# Altium PCB CH585M-R1-1v1.PcbDoc
Units mil, origin at the board's own origin, x right, y up, seen from the top; angles counter-clockwise.
Board outline 4173.23 x 2325.79 mil, 2 copper layers (Top Layer, Bottom Layer); 49 components, 68 nets, 239 pads, 569 vias.
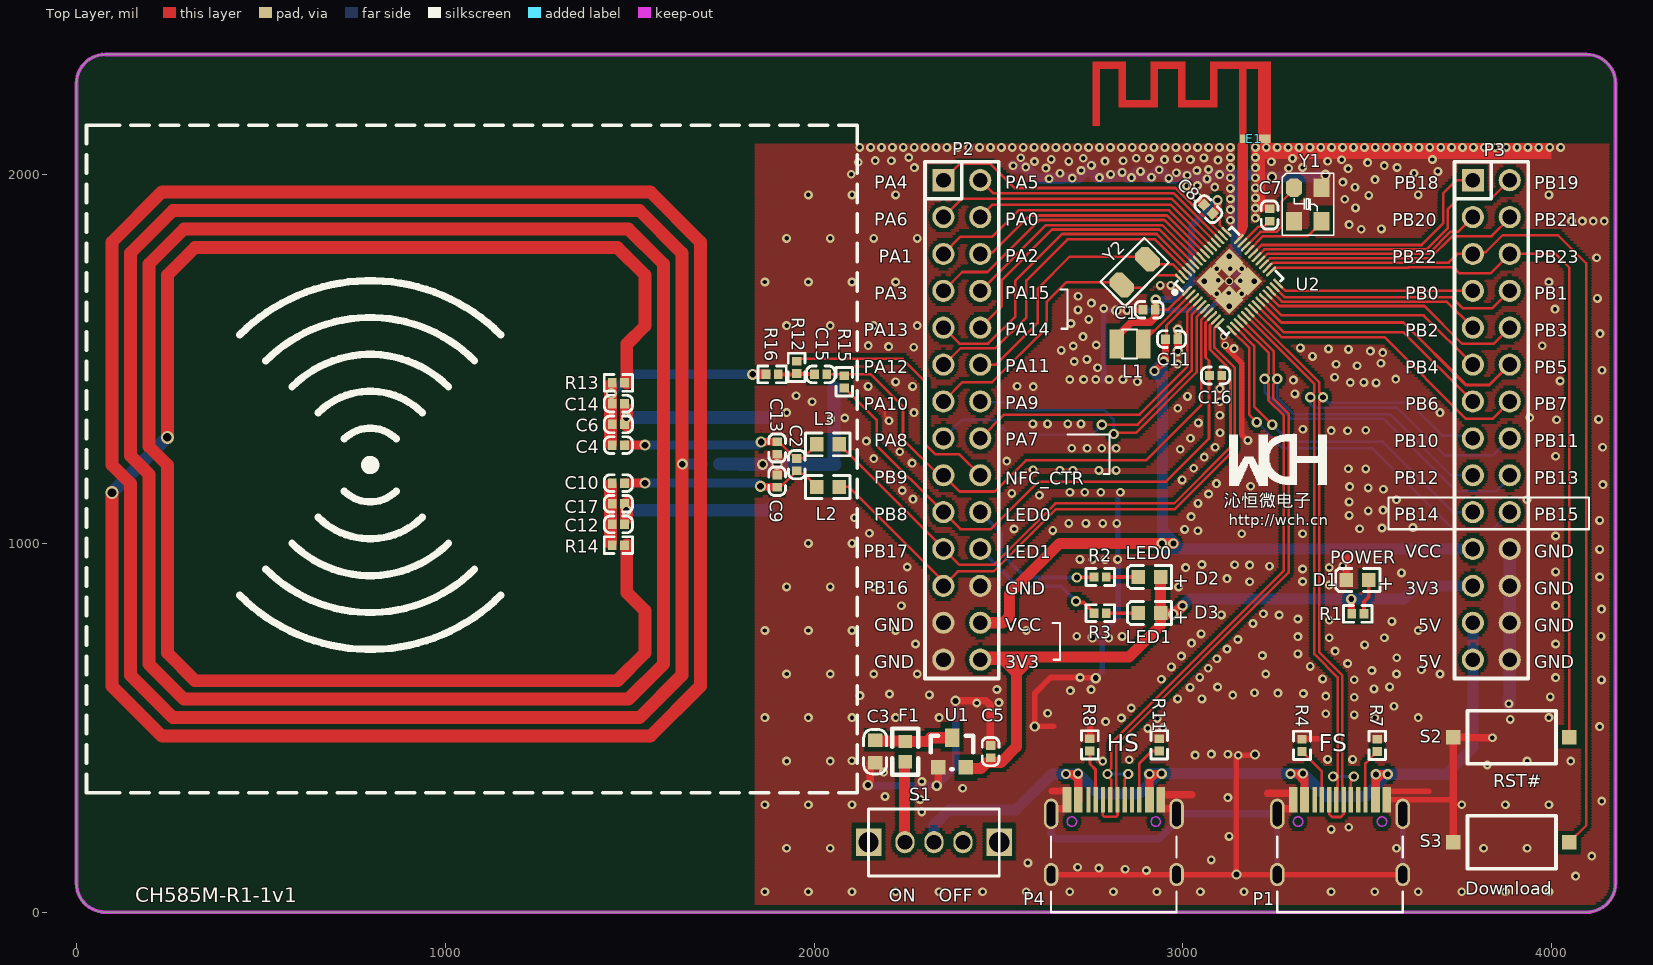
[diagram p0: Top Layer view]
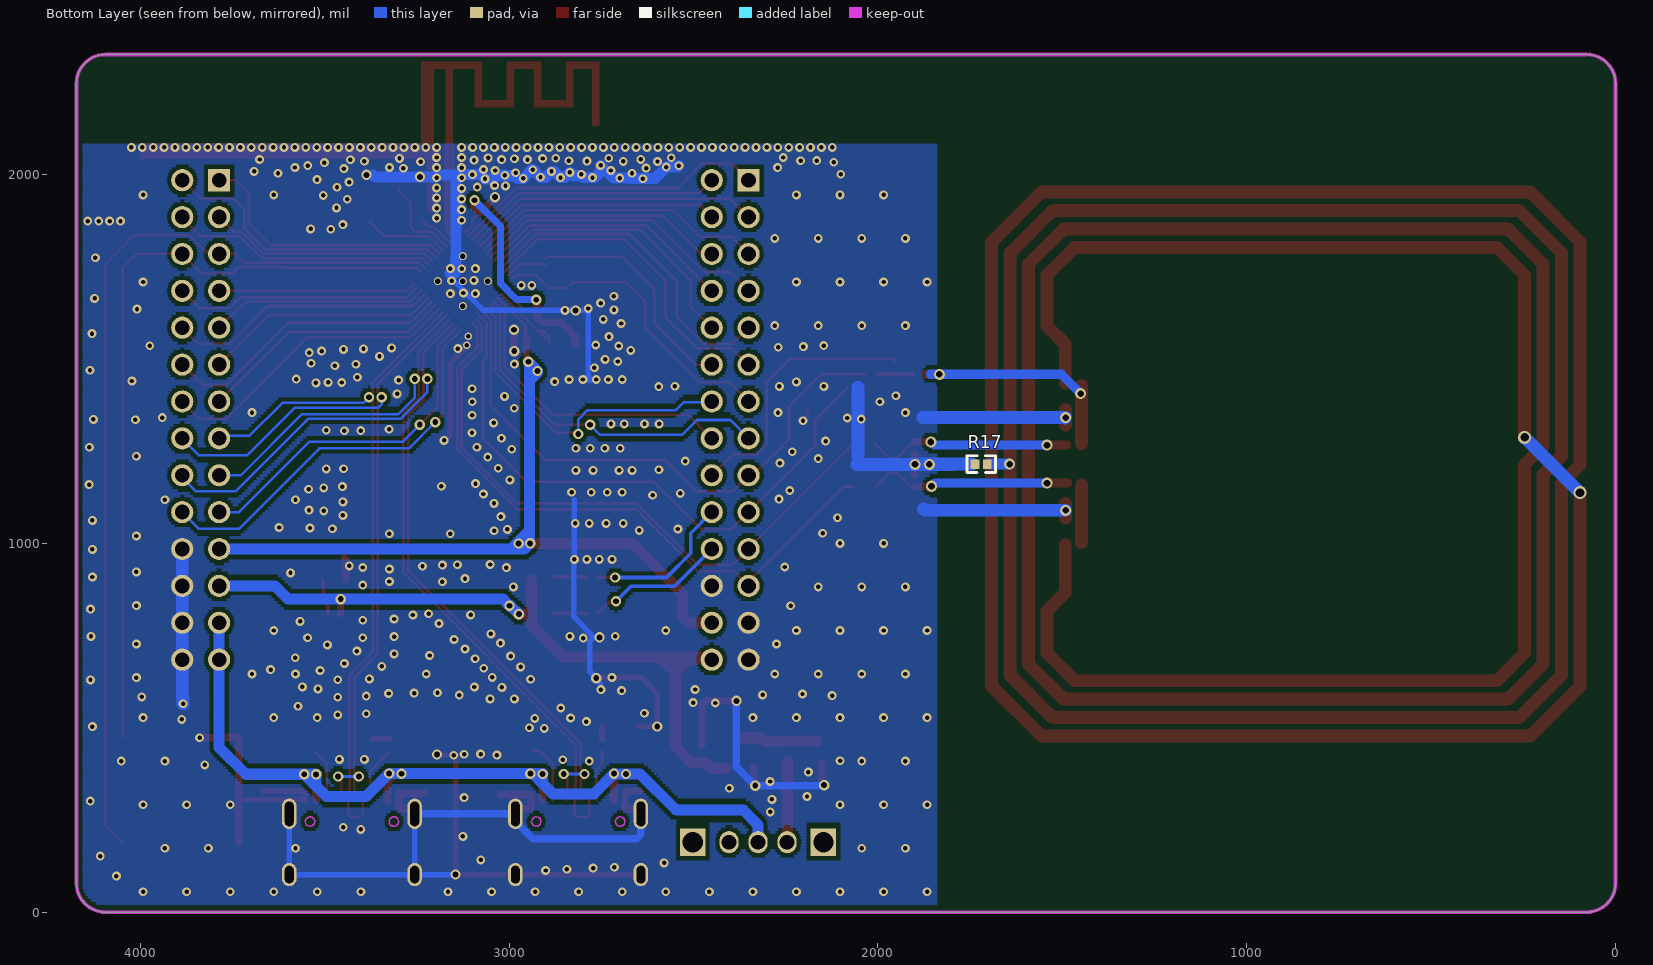
[diagram p1: Bottom Layer view, seen from below]

## Layer stack, top to bottom
Top Solder: solder mask 0.4, Solder Resist, Dk 3.5
Top Layer: signal copper 1.4
Dielectric1: dielectric 12.6, FR-4, Dk 4.8
Bottom Layer: signal copper 1.4
Bottom Solder: solder mask 0.4, Solder Resist, Dk 3.5

## Board outline
0,78.74 0,2247.05 cw(c78.74,2247.05) 78.74,2325.79 78.49,2325.79 4094.49,2325.79 cw(c4094.49,2247.05) 4173.23,2247.05 4173.23,78.74 cw(c4094.49,78.74) 4094.49,0 78.74,0 cw(c78.74,78.74)

## Design rules (kind name [scope] priority, off if disabled: settings)
Clearance Clearance_1 [InNet('ANT') vs InPolygon] p1: gap=6 ignorepadtopadclearanceinfootprint=FALSE
Clearance Clearance_3 [InPolygon] p2: gap=10 ignorepadtopadclearanceinfootprint=FALSE except(0: Arc-Hole Track-Hole SMDPad-Hole THPad-Hole Via-Hole Fill-Hole Poly-Hole Region-Hole Text-Hole)
Clearance [All] p3: gap=6 ignorepadtopadclearanceinfootprint=FALSE except(0: Arc-Hole Track-Hole SMDPad-Hole THPad-Hole Via-Hole Fill-Hole Poly-Hole Region-Hole Text-Hole; 5: Arc-Arc Arc-Track Track-Track)
ComponentClearance [All] p1 off: gap=10 collisioncheckmode=3 verticalgap=10 showdistances=FALSE
DiffPairsRouting [All] p1: maxlimit=10 minlimit=6 mostfreqgap=10 toplayer_minwidth=7 toplayer_maxwidth=15 toplayer_prefwidth=15 bottomlayer_minwidth=7 bottomlayer_maxwidth=15 bottomlayer_prefwidth=15 maxuncoupledlength=500
MinimumSolderMaskSliver [All] p1 off: minsoldermaskwidth=10
PolygonConnect [All] p1: connectstyle=Direct reliefconductorwidth=10 reliefentries=4 polygonreliefangle="90 Angle" airgapwidth=10
RoutingVias [All] p1: holewidth=12 width=24 viastyle="Through Hole" minholewidth=12 minwidth=20 maxholewidth=28 maxwidth=50
SilkToSilkClearance [All] p1 off: silktosilkclearance=10
SilkToSolderMaskClearance SilkscreenOverComponentPads [IsPad] p1 off: minsilkscreentomaskgap=10 clearancetoexposedcopper=TRUE
SolderMaskExpansion [All] p1 off: expansion=4 istentingtop=FALSE
Width [All] p1: maxlimit=50 minlimit=5 preferedwidth=7
25 further rules are at their usual default settings.

## Classes and differential pairs
differential pair NewDifferentialPair2: +PB12 -PB13
differential pair NewDifferentialPair1: +PB11 -PB10

## Components (designator, comment, footprint, x,y, rotation, side; value= is the part's Value field where it differs from the comment)
C1 "4.7uF" 0402_C 2891.72,1633.63 r90 top
C2 "NC" 0402_C 1953.25,1196.9 r180 top
C3 "10uF" 0603_C 2165.66,465.84 r270 top
C4 "30pF 2%" 0402_C 1486.18,1266.57 r270 top
C5 "2.2uF" 0402_C 2478.58,418.79 r180 top
C6 "NC" 0402_C 1486.18,1322.8 r270 top
C7 "0.47uF" 0402_C 3235.14,1873.7 r180 top
C8 "0.1uF" 0402_C 3080.9,1894.43 r225 top
C9 "100pF 2%" 0402_C 1899.73,1151.91 r180 top
C10 "30pF 2%" 0402_C 1486.18,1163.57 r270 top
C11 "2.2uF" 0402_C 2986.3,1554.11 r270 top
C12 "200pf 2%" 0402_C 1452.71,1051.45 r90 top
C13 "100pF 2%" 0402_C 1899.73,1241.89 r180 top
C14 "200pf 2%" 0402_C 1486.18,1379.03 r270 top
C15 "10nF" 0402_C 2034.57,1458.25 r270 top
C16 "10nF" 0402_C 3072.06,1455.25 r90 top
C17 "NC" 0402_C 1452.71,1107.51 r90 top
D1 "POWER" 0603+ 3504.03,900.95 r180 top
D2 "LED0" 0603+ 2939.62,908.87 r180 top
D3 "LED1" 0603+ 2939.62,810.95 r180 top
E1 "ANTENNA" ANT-F-1-2.4G-1.6mmFR4 3162.96,2097.58 r0 top
F1 "500mA" 0603#1 2247.16,408.02 r90 top
L1 "10uH" SMD_2x2mm 2856.67,1540.69 r180 top
L2 "1uH" 0603#2 2067.69,1153.3 r180 top
L3 "1uH" 0603#2 2067.69,1268.68 r180 top
P1 "TYPE-C FS-USB" TYPE-C-Receptacle-2.0 3426.19,304.73 r0 top
P2 "HEADER 14x2" IDC28-2.54MM 2350.68,1984.85 r0 top
P3 "HEADER 14x2" IDC28-2.54MM 3786.38,1984.85 r0 top
P4 "TYPE-C HS-USB" TYPE-C-Receptacle-2.0 2812.87,304.73 r0 top
R1 "1K" 0402 3491.14,808.87 r180 top
R2 "1K" 0402 2759.11,908.87 r0 top
R3 "1K" 0402 2759.11,810.95 r0 top
R4 "5.1K" 0402 3323.07,469.13 r270 top
R7 "5.1K" 0402 3526.94,435.66 r90 top
R8 "5.1K" 0402 2747.89,470.39 r270 top
R11 "5.1K" 0402 2935.89,436.93 r90 top
R12 "1kΩ" 0402 1952.7,1460.49 r90 top
R13 "2Ω" 0402 1452.71,1435.26 r0 top
R14 "2Ω" 0402 1452.71,995.39 r0 top
R15 "NC" 0402 2082.14,1454.79 r270 top
R16 "2kΩ" 0402 1869.59,1458.25 r0 top
R17 "NC" 0402 1703.34,1215.07 r0 bottom
S1 "SW" SW1 2325.02,189.78 r0 top
S2 "RST#" SMD_6.1x3.65x2.5mm-KEY 3733.3,474.8 r0 top
S3 "Download" SMD_6.1x3.65x2.5mm-KEY 3733.3,189.73 r0 top
U1 "6219P33M" SOT-23 2336.53,393.02 r0 top
U2 "CH585M" QFN48_5X5 3125.28,1711.17 r315 top
Y1 "32MHz" XT3225 3301.03,1964.24 r270 top
Y2 "32.768K" fc-135 2834.49,1700.62 r45 top

## Footprints (in the part's own frame and the unit in brackets; to place one, negate y for a bottom-side part, rotate by r counter-clockwise, add the part's x,y. Pads: shape width x height; smd on the part's side, far side on the other; paste and mask are expansions set on the pad)
0402 [mm]
  rect 0.6x0.65 smd mask+0.051: 1(0,0) 2(0.85,0)
  silkscreen extent -0.55,-0.58 1.4,0.57
0402_C [mm]
  rect 0.65x0.6 smd mask+0.051: 1(0,0) 2(0,-0.85)
  silkscreen extent -0.58,-1.4 0.57,0.55
0603#1 [mil]
  rect 36x36 smd: 1(0,0) 2(55,0)
  silkscreen extent -35,-35 90,35
0603#2 [mil]
  rect 36.61x38.58 smd: 1(0,0) 2(60.63,0)
  silkscreen extent -30,-31 91,31
0603+ [mm]
  rect 0.93x0.98 smd: 1(0,0) 2(1.54,0)
  silkscreen extent -0.76,-0.79 2.27,0.79
0603_C [mm]
  rect 0.93x0.98 smd mask+0.051: 1(0,0) 2(1.54,0)
  silkscreen extent -0.76,-0.79 2.31,0.79
ANT-F-1-2.4G-1.6mmFR4 [mm]
  rect 0.8x0.6 smd mask+0: 0(1.483,0)
  rect 0.4x0.6 smd mask+0: 1(0,0)
  Top Layer region: 0.24,5.027 -0.26,5.027 -0.26,-0.304 0.24,-0.304
  Top Layer region: 1.94,5.002 1.04,5.002 1.04,-0.304 1.94,-0.304
  Top Layer region: 1.94,5.296 -2.26,5.296 -2.26,4.796 1.94,4.796
  Top Layer region: -1.76,4.977 -2.26,4.977 -2.26,2.157 -1.76,2.157
  Top Layer region: -1.85,2.651 -4.39,2.651 -4.39,2.156 -1.85,2.156
  Top Layer region: -3.96,4.976 -4.46,4.976 -4.46,2.156 -3.96,2.156
  Top Layer region: -3.96,5.296 -6.36,5.296 -6.36,4.796 -3.96,4.796
  Top Layer region: -5.86,4.977 -6.36,4.977 -6.36,2.157 -5.86,2.157
  Top Layer region: -5.875,2.657 -8.364,2.657 -8.364,2.157 -5.875,2.157
  Top Layer region: -8.06,4.977 -8.56,4.977 -8.56,2.157 -8.06,2.157
  Top Layer region: -8.06,5.296 -10.36,5.296 -10.36,4.796 -8.06,4.796
  Top Layer region: -9.86,4.976 -10.36,4.976 -10.36,0.856 -9.86,0.856
fc-135 [mil]
  oct 50x70 smd: 1(0,0) 2(98.43,0)
  silkscreen extent -35,-47 133,47
IDC28-2.54MM [mil]
  rect 60x60 hole 40: 1(0,0)
  round 60 hole 40: 2(100,0) 3(0,-100) 4(100,-100) 5(0,-200) 6(100,-200) 7(0,-300) 8(100,-300) 9(0,-400) 10(100,-400) 11(0,-500) 12(100,-500) 13(0,-600) 14(100,-600) 15(0,-700) 16(100,-700) 17(0,-800) 18(100,-800) 19(0,-900) 20(100,-900) 21(0,-1000) 22(100,-1000) 23(0,-1100) 24(100,-1100) 25(0,-1200) 26(100,-1200) 27(0,-1300) 28(100,-1300)
  silkscreen extent -50,-1351 150,50
QFN48_5X5 [mm]
  round 0.559 hole 0.381 mask+0.102: 0(-1.219,-1.219) 0(-1.219,1.219) 0(0,0) 0(1.219,1.219) 0(1.219,-1.219)
  rect 1.397x1.397 smd mask+0: 0(-0.901,-0.895) 0(-0.901,0.908) 0(0.902,-0.895) 0(0.902,0.908)
  oval 0.18x0.9 smd mask+0.051: 1(-1.575,-2.519) 2(-1.225,-2.519) 3(-0.875,-2.519) 4(-0.525,-2.519) 5(-0.175,-2.519) 6(0.175,-2.519) 7(0.525,-2.519) 8(0.875,-2.519) 9(1.225,-2.519) 10(1.575,-2.519) 25(1.575,2.519) 26(1.225,2.519) 27(0.875,2.519) 28(0.525,2.519) 29(0.175,2.519) 30(-0.175,2.519) 31(-0.525,2.519) 32(-0.875,2.519) 33(-1.225,2.519) 34(-1.575,2.519)
  oval 0.9x0.18 smd mask+0.051: 11(2.514,-2.275) 12(2.514,-1.925) 13(2.514,-1.575) 14(2.514,-1.225) 15(2.514,-0.875) 16(2.514,-0.525) 17(2.514,-0.175) 18(2.514,0.175) 19(2.514,0.525) 20(2.514,0.875) 21(2.514,1.225) 22(2.514,1.575) 23(2.514,1.925) 24(2.514,2.275) 35(-2.514,2.275) 36(-2.514,1.925) 37(-2.514,1.575) 38(-2.514,1.225) 39(-2.514,0.875) 40(-2.514,0.525) 41(-2.514,0.175) 42(-2.514,-0.175) 43(-2.514,-0.525) 44(-2.514,-0.875) 45(-2.514,-1.225) 46(-2.514,-1.575) 47(-2.514,-1.925) 48(-2.514,-2.275)
  silkscreen extent -2.51,-3.31 2.51,2.77
SMD_2x2mm [mm]
  rect 1x2 smd: 1(-0.905,0) 2(0.905,0)
  silkscreen extent -0.47,-1 0.53,1
SMD_6.1x3.65x2.5mm-KEY [mm]
  rect 1x1 smd: 1(0,0) 2(8,0)
  silkscreen extent 0.98,-1.83 7.08,1.83
SOT-23 [mil]
  rect 40x40 smd: 1(0,0) 2(75,0)
  rect 40x50 smd: 3(38,80)
  silkscreen extent -20,-5 95,85
SW1 [mm]
  rect 1.75x1.9 hole 1.4: 0(-4.5,0) 0(4.5,0)
  oval 1.321x1.524 hole 1.016: 1(0,0) 2(-2,0) 3(2,0)
  silkscreen extent -4.51,-2.31 4.5,2.29
TYPE-C-Receptacle-2.0 [mm]
  oval 1x1.6 hole 0.6 slot 1.2 at 90 deg: 0(-4.32,-5.15) 0(4.32,-5.15)
  oval 1x2.1 hole 0.6 slot 1.7 at 90 deg: 0(-4.32,-0.97) 0(4.32,-0.97)
  rect 0.6x1.75 smd mask+0.051: A1(-3.225,0) A4(-2.45,0) B1(3.225,0) B4(2.45,0)
  rect 0.3x1.75 smd mask+0.051: A5(-1.25,0) A6(-0.25,0) A7(0.25,0) A8(1.25,0) B5(1.75,0) B6(0.75,0) B7(-0.75,0) B8(-1.75,0)
  Keep-Out Layer circle w0.1: c-2.89,-1.5 r0.325
  Keep-Out Layer circle w0.1: c2.89,-1.5 r0.325
  silkscreen extent -4.32,-7.75 4.32,-2.55
XT3225 [mm]
  oct 1.3x1.1 smd: 1(0,0)
  rect 1.3x1.1 smd: 2(2.3,0) 3(2.3,1.9) 4(0,1.9)
  silkscreen extent -1.02,-0.8 3.27,2.74

## Part data
C1 C2 C3 C4 C5 C6 C7 C8 C9 C10 C11 C12 C13 C14 C15 C16 C17: library part CAP, "Capacitor"
D1 D3: library part LED0, "Typical INFRARED GaAs LED", LatestRevisionDate=08-Jul-2005, LatestRevisionNote="Mech Layer 1 removed.", PackageReference=LED-0, Published=8-Jun-2000, Publisher="Altium Limited"
D2: "Typical INFRARED GaAs LED", LatestRevisionDate=08-Jul-2005, LatestRevisionNote="Mech Layer 1 removed.", PackageReference=LED-0, Published=8-Jun-2000, Publisher="Altium Limited"
E1: "Generic Antenna"
F1: library part FUSE1, "Fuse"
L1 L2 L3: library part INDUCTOR
P1 P4: library part TYPE-C-Receptacle-2.0, "Type-C USB2.0 母座"
P2 P3: "Header, 14-Pin, Dual row"
R1 R2 R3 R12 R13 R14 R15 R16 R17: library part RES
R4 R7 R8 R11: library part RES2
S2 S3: library part SW-PB, "Switch", LatestRevisionDate=17-Jul-2002, LatestRevisionNote="Re-released for DXP Platform.", PackageDescription="Switch; 2 Leads", PackageReference=SPST-2, Published=24-Mar-1999, Publisher="Altium Limited"
U2: "RISC-V MCU with BLE/HSUSB/USB/NFC/ADC/PWM/2*SPI/I2C/4*UART/LCD"
Y1: library part 晶体
Y2: library part XTAL, "Crystal Oscillator", LatestRevisionDate=17-Jul-2002, LatestRevisionNote="Re-released for DXP Platform.", PackageDescription="Crystal, Thru-Hole; 2 Leads; Body 3.1 x 8.2 mm (Dia.xH)", PackageReference=R38, Published=8-Jun-2000, Publisher="Altium Limited"

## Via types
v1: diameter 24, hole 12, Top Layer to Bottom Layer, tented both sides, 488 vias
v2: diameter 28, hole 16, Top Layer to Bottom Layer, tented both sides, 45 vias
v3: diameter 24.02, hole 12, Top Layer to Bottom Layer, tented both sides, 21 vias
v4: diameter 30, hole 18, Top Layer to Bottom Layer, tented both sides, 11 vias
v5: diameter 35.43, hole 23.62, Top Layer to Bottom Layer, tented both sides, 2 vias
v6: diameter 20, hole 12, Top Layer to Bottom Layer, tented both sides, 2 vias

## Nets (pads, with @x,y where several pads share a name; then routed paths per layer and width w, separated by ;. In a path a pad name is that pad's centre, name@x,y a point inside that pad or via, vN(x,y) a via of type N, cw(c..) or ccw(c..) an arc to the next point about the centre after c; other vN are vias at no path point)
+3V3: C5.1 D2.1 D3.1 P2.28 P3.23 R1.2 U1.2 | length 2178.2
  Top Layer w20: v2(3456.63,848.76) 3457.15,848.23 3457.15,809.4 R1.2
  Top Layer w30: U1.2@2411.53,390.02 2452.81,390.02 2469.25,406.46 2506.48,406.46 2548.74,448.72 2548.74,648.51 ; P2.28 2512.39,684.85 ; P2.28@2462.19,691.62 2519.16,691.62 ; D2.1@2939.62,900.95 D3.1@2939.62,808.87 ; v2(2998.89,830.9) 2976.35,808.35 v2(2973.76,808.35) 2973.24,808.87 D3.1@2939.62,808.87 ; 2512.39,684.85 2519.16,691.62 ; 2512.39,684.85 2548.74,648.51 ; 2519.16,691.62 2548.74,691.62 ; 2548.74,648.51 2548.74,691.62 ; 2548.74,648.51 2591.85,691.62 ; 2548.74,691.62 2591.85,691.62 ; 2591.85,691.62 2854.07,691.62 2939.62,777.17 D3.1@2939.62,808.87
  Bottom Layer w30: v2(2973.76,808.35) 2996.3,830.9 v2(2998.89,830.9) 3016.75,848.76 v2(3456.63,848.76) 3599.02,848.76 3635.12,884.85 P3.23
+5V: P1.A4 P1.B4 P3.25 P3.27 P4.A4 P4.B4 S1.1 | length 2666.4
  Top Layer w22: v2(2683.07,374.93) 2683.39,375.26 2699.04,375.26 ; P4.A4 2716.41,357.89 ; P4.B4 2909.17,304.87 2909.17,359.07 ; v2(2942.36,375.58) 2942.03,375.26 2925.37,375.26 ; v2(3292.1,375.51) 3292.38,375.79 3308.82,375.79 ; P1.A4 3329.73,354.87 ; P1.B4 3523.03,305.11 3523.03,357.39 ; v2(3555.7,374.08) 3555.55,373.92 3539.56,373.92 ; 2699.04,375.26 2716.41,357.89 ; 2699.04,375.26 2715.35,375.26 v2(2715.67,375.58) 2716.41,374.85 2716.41,357.89 ; 2909.17,359.07 2925.37,375.26 ; 2909.17,359.07 2909.17,374.78 v2(2909.03,374.93) 2909.35,375.26 2925.37,375.26 ; 3308.82,375.79 3329.73,354.87 ; 3308.82,375.79 3325.26,375.79 v2(3325.54,376.06) 3325.54,374.44 3329.73,370.24 3329.73,354.87 ; 3523.03,357.39 3539.56,373.92 ; 3523.03,357.39 3523.03,373.38 v2(3523.42,373.77) 3523.58,373.92 3539.56,373.92
  Bottom Layer w30: S1.1 2325.02,236.62 2365.2,276.8 2546.91,276.8 2645.04,374.93 v2(2683.07,374.93) 2715.02,374.93 v2(2715.67,375.58) 2770.63,320.63 2880.97,320.63 2909.03,348.69 ; P3.25 P3.27 3786.38,446.89 3713.56,374.08 v2(3555.7,374.08) ; 2909.03,348.69 v2@2935.92,375.58 ; 2909.03,348.69 v2(2909.03,374.93) 2908.37,375.58 v2@2935.92,375.58 ; v2@2935.92,375.58 v2(2942.36,375.58) 3325.06,375.58 v2(3325.54,376.06) 3387.83,313.77 3495.4,313.77 3523.42,341.79 ; 3523.42,341.79 v2(3555.7,374.08) ; 3523.42,341.79 v2(3523.42,373.77) 3523.73,374.08 v2(3555.7,374.08)
ANT: E1.1 U2.34 | length 538.9
  Top Layer w7: 3152.17,1884.39 3152.17,1826.62 cw(c3150.07,1826.62) U2.34@3151.58,1825.16 ; 3158.6,1883.44 3158.6,1842.13 cw(c3134.56,1842.13) U2.34@3151.58,1825.16 ; 3162.72,1885.26 3162.72,1852.09 cw(c3124.6,1852.09) U2.34@3151.58,1825.16 ; 3167.38,1882.52 3167.38,1863.33 cw(c3113.36,1863.33) U2.34@3151.58,1825.16 ; 3173.27,1916.89 3173.27,1866.89 cw(c3124.9,1866.89) 3159.1,1832.68 U2.34@3151.58,1825.16 ; U2.34@3151.58,1825.16 ccw(c3099.8,1876.89) U2.34@3152.22,1825.81 ; U2.34@3151.58,1825.16 ccw(c3115.86,1860.83) U2.34@3152.22,1825.81 ; U2.34@3151.58,1825.16 ccw(c3100.41,1876.28) U2.34@3152.22,1825.81
  Top Layer w28.1: 3162.72,1885.26 3162.72,2078.36
BOOT: P3.5 S3.2 U2.26 | length 2521.1
  Top Layer w7: U2.26 3243.54,1761.22 3720.83,1761.22 3744.46,1784.85 P3.5 3791.11,1789.58 3821.28,1789.58 3867.29,1835.6 4017.73,1835.6 4093.81,1759.52 4093.81,1472.03 4093.81,235.27 S3.2
GND: C1.1 C3.2 C5.2 C6.1 C7.2 C8.2 C9.2 C11.1 C12.2 C13.1 C14.1 C16.2 C17.2 D1.2 E1.0 P1.0 P1.A1 P1.B1 P2.24 P2.25 P2.27 P3.22 P3.24 P3.26 P3.28 P4.0 P4.A1 P4.B1 R4.1 R7.2 R8.1 R11.2 R17.2 S2.1 S3.1 U1.1 U2.0 Y1.2 Y1.4 | length 10197.8
  Top Layer w7: 2188.9,1360.86 2192.15,1357.61 2192.15,1345.27 2203.25,1334.18 v1(2203.25,1332.46) ; v6@3109.49,1538.74 3109.49,1561.29 v6@3109.9,1561.71
  Top Layer w15: P4.0@2642.79,101.97 2982.94,101.97 3256.11,101.97 P1.0@3596.27,101.97 ; 2649.24,503.78 v2(2598.35,503.78) 2598.35,593.42 2641.33,636.39 v1(2721.58,636.39) 2722.44,635.53 2762.88,635.53 v2(2763.73,634.67) ; R8.1@2747.89,469.13 2748.21,469.45 2748.21,501.11 2748.53,501.43 ; v2(2819.67,1631.69) v1(2848.61,1631.69) 2889.78,1631.69 C1.1 ; v6@3110.73,1537.64 3159.49,1488.88 3159.49,1295.88 v1(3176.17,1279.19) ; v2(3145.31,102.19) 3145.31,425.51 3193.81,425.51 v2(3195.8,427.5) ; R4.1@3323.07,470.89 3323.95,470.01 3369.11,470.01 3369.99,470.89 ; 3666.63,328.16 3557.47,328.16 3553.16,323.85 P1.B1 3733.3,304.73
  Top Layer w20: C9.2 C13.1 ; v2(2145.9,344.65) 2145.9,346.81 2152.66,353.57 C3.2@2152.66,405.21 ; v2(2332.7,343.29) 2332.7,345.45 2336.53,349.29 U1.1 ; v2(2383.73,573.03) 2466.24,573.03 2477.95,561.32 2477.95,452.88 C5.2 ; P4.0@2642.79,266.54 2642.79,271.33 2651.74,280.28 2684.09,280.28 2685.9,282.09 P4.A1 2685.9,326.94 2684.09,328.75 2645.83,328.75 ; P4.0@2982.94,266.54 2982.94,271.33 2974,280.28 2941.65,280.28 2939.83,282.09 P4.B1 2939.83,316.68 2941.65,318.49 3023.74,318.49 ; v2(2986.21,1521.45) v2(2986.21,1521.45) 2986.25,1554.07 C11.1 2986.55,1554.36 2986.55,1578.99 v2(2986.79,1579.24) ; v2(3038.44,1938.89) 3038.44,1936.9 C8.2 C8.2@3057.24,1916.19 ; 3212.64,1907.1 3212.64,2059.04 v1@3223.86,2070.26 ; 3229.91,322.7 3297.41,322.7 3299.22,320.89 P1.A1 3299.22,282.09 3297.41,280.28 3265.06,280.28 3256.11,271.33 P1.0@3256.11,266.54 ; D1.2 3443.4,955.18 3446.54,958.32 3446.54,960.48 ; S3.1 3733.3,304.73 S2.1 3787.18,474.8 3789.06,472.92 v1(3839.18,472.92)
  Top Layer w35: 1491.18,1069.42 v4(1491.18,1089.8) C17.2@1491.18,1108.36 ; C6.1@1491.18,1321.04 v4(1491.18,1340.87) 1491.18,1362.59
  Bottom Layer w15: 2753.53,620.96 v2@2763.73,631.16 ; v2(2755,745.19) 2769.47,745.19 ; v2(2763.73,634.67) 2781.44,652.38 2781.44,735.03 2771.28,745.19 2769.47,745.19 ; 2781.35,1441.5 2781.35,1448.88 ; 2785.42,1442.73 2785.42,1632.89 2787.86,1635.33 2789.58,1635.33 2793.22,1631.69 v2(2819.67,1631.69) v1(2848.61,1631.69) 3069.96,1631.69 3169,1730.73 ; 2822.99,1118.86 v1(2822.99,956.69) 2822.99,953.27 2824.39,951.87 2824.39,800.11 2769.47,745.19 ; v2(3145.31,102.19) 3145.42,102.08 3256,102.08 P1.0@3256.11,101.97 ; P1.0@3256.11,266.54 P1.0@3256.11,101.97 ; P1.0@3596.27,266.54 3596.27,101.97 P1.0@3256.11,101.97
  Bottom Layer w20: v2(2145.9,344.65) 2147.26,343.29 v2(2332.7,343.29) 2383.73,394.33 v2(2383.73,573.03) ; P4.0@2642.79,266.54 2642.79,210.76 2654.5,199.04 2935.93,199.04 2982.94,246.06 2982.94,266.54 P1.0@3256.11,266.54
  Bottom Layer w25: v4@1898.13,1214.28 v4(1899.48,1214.28)
  Bottom Layer w30: v1(2539.86,2024.19) 2543.74,2020.31 v1(2574.01,2020.31) 2574.01,2019.91 2605.05,1988.87 v1(2637.46,1988.87) 2671.58,1988.87 2673.26,1990.54 v1(2700.17,1990.54) 2717.57,1990.54 v1(2752.15,2025.12) ; v1@2752.15,2016.47 2752.15,2006.64 2767.06,1991.73 v1(2774.04,1991.73) 2798.84,1991.73 2804.06,1996.94 2826.19,1996.94 v1(2835.14,2005.9) 2849.04,1992.01 v1(2860.74,1992.01) 2877.56,2008.83 v1(2885.24,2008.83) 2901.2,1992.86 v1(2914.94,1992.86) 2935.32,2013.25 v1(2936.18,2013.25) 2938.41,2013.25 v1(2961.79,1989.87) 2975.42,1989.87 2982.5,1996.94 v1@3010.49,1996.94 ; v1(3011.36,1998.26) 3032.56,1998.26 3042.59,1988.24 v1(3065.54,1988.24) 3077.15,1999.85 v1(3099.51,1999.85) 3128.26,1999.85 3128.76,1999.35 3144.25,1999.35 ; 3144.25,1755.48 3144.25,1999.35 ; 3146.84,1733.82 3146.84,1755.48 ; 3368.69,1999.35 3363.36,1994.02 v2(3241.75,1994.02) 3201.95,1994.02 3196.62,1999.35 3144.25,1999.35
  Bottom Layer w35: v4(1491.18,1089.8) 1873.02,1089.8 1876.78,1093.56 ; v4@1492.18,1339.87 v4(1491.18,1340.87) 1878.5,1340.87 ; R17.2@1743.73,1215.07 v4@1890.48,1215.07 ; 1799.48,1214.28 v4@1898.13,1214.28 ; v4(1899.48,1214.28) 2057.43,1214.28 ; 2054.31,1234.78 2054.31,1422.57 ; v1(3884.08,565.34) 3884.08,581.45 3886.38,583.75 P3.28 P3.26 P3.24 P3.22
  other v1: 1866.61,55.28 1984.72,55.28 2102.83,55.28 2220.94,55.28 2339.05,55.28 2457.16,55.28 2575.27,55.28 2693.38,55.28 2811.49,55.28 2929.61,55.28 3047.72,55.28 3165.83,55.28 3402.05,55.28 3520.16,55.28 3638.27,55.28 3756.38,55.28 3874.49,55.28 3992.6,55.28 4064.99,97.87 2901.03,113.12 2843.44,116.32 2772.25,119.52 2714.65,121.92 2579.97,133.67 3077.01,141.92 4108.68,152.1 1925.67,173.39 2043.78,173.39 3579.21,173.39 3815.43,173.39 3933.54,173.39 3125.37,205.55 2291.84,272.07 1866.61,291.5 1984.72,291.5 2102.83,291.5 3756.38,291.5 3874.49,291.5 3992.6,291.5 4135.79,301.23 2287.67,305.89 3122.3,310.68 2192.31,313.68 2402.9,335.95 2292.26,354.32 2188.63,379.97 3825.43,399.61 1925.67,409.61 2043.78,409.61 2782.65,409.64 3933.54,409.61 4051.65,409.61 2102.7,410.65 2854.8,413.55 3033.32,425.93 3150.14,425.51 3122.28,428.33 3077.28,428.7 2904.72,498.25 2945.06,500.06 4130.22,503.42 2790.69,516.66 3887.71,522.81 2930.69,525.5 2833.47,526.62 1866.61,527.72 1984.72,527.72 2102.83,527.72 2220.94,527.72 2339.05,527.72 3520.16,527.72 3638.27,527.72 3992.6,527.72 2633.19,539.62 2860.11,553.65 3572.61,558.31 2441.15,567.22 2501.16,568.26 2985.83,578.57 3051.62,578.57 3996.23,583.85 2124.18,587.41 2312.6,589.25 3135.18,588.77 2204.58,591.7 3326.69,593.04 3257.77,594.26 3194.34,594.87 2695.06,600.71 2495.77,603.79 2751.22,603.41 3518.38,605.35 3019.84,609.52 3094.31,610.73 3560.46,610.95 4135.13,629.99 2941.7,631.55 4010.71,636.25 3045.8,636.61 1925.67,645.83 2043.78,645.83 2161.89,645.83 2280,645.83 3224.88,645.83 3579.21,645.83 3697.32,645.83 3512.57,655.42 3646.88,657.93 3069,661.59 2968.81,665.02 3092.22,687.13 3579.81,690.06 2996.22,694.44 3215.68,696.12 3119.69,713.73 3492.9,724.71 2275.06,727.21 4010.71,727.23 3023.5,729.55 3149.33,739.45 2799.24,743.09 3546.64,744 2712.25,748.21 2835.11,748.01 4133.9,747.96 3049.5,754.69 1866.61,763.94 1984.72,763.94 2102.83,763.94 2220.94,763.94 2575.27,763.94 3638.27,763.94 3190.24,782.89 3566.85,788.69 3104.43,806.19 3260.99,805.88 3218.54,809.41 4135.13,821.7 2236.68,830.82 4010.71,831.3 1925.67,882.05 2043.78,882.05 2161.89,882.05 2988.66,882.05 3181.02,896.02 3324.65,896.76 3119.71,904.39 4130.22,908.94 3592.83,920.21 4010.71,922.67 3324.65,930.63 3007.3,934.21 2252.86,936.01 3234.87,938.2 3433.49,939.04 3181.02,941.09 3140.32,942.1 3051.51,942.87 2720.74,956.69 2755.65,956.69 2789.29,956.69 4130.22,983.91 1984.72,1000.17 2102.83,1000.17 4010.71,1020.16 3159.66,1026.31 3324.65,1026.31 2150.08,1027.72 3040.7,1034.18 2647.32,1035.24 3004.83,1038.07 2542.32,1039.07 3479.4,1039.84 3539.89,1041.77 3623.62,1043.22 2690.74,1054.3 2737.14,1054.3 2782.96,1054.3 2820.62,1054.3 4130.22,1062.55 2109.75,1069.39 3022.35,1072.55 3450.84,1076.13 3502.63,1088.23 3542.8,1090.17 3040.98,1108.43 3450.84,1112.43 3579.21,1118.28 3933.54,1118.28 2268.33,1120.31 2611.16,1130.51 3069.78,1134.02 2535.91,1135.44 2693.83,1138.57 2733.81,1138.57 2777.48,1138.57 2830.79,1138.57 2239.33,1143.39 3543.76,1146.79 3502.63,1150.67 3452.29,1154.05 3183.73,1154.86 4138.82,1159.63 3091.32,1162.2 2997.89,1172.31 2666.76,1198.15 2701.85,1198.15 2772.33,1198.15 2819.18,1198.15 2593.77,1199.87 3495.85,1201.97 3448.91,1202.45 3029.61,1203.64 2265.93,1217.6 2522.39,1223.29 2162.04,1230.06 3057.88,1233.83 4010.71,1236.39 2232.47,1248.53 2992.89,1255.38 2698.73,1257.94 2740.27,1257.94 2780.15,1257.94 2819.18,1257.94 3087.41,1260.87 4138.28,1260.58 2142.07,1277.41 3020.77,1285.31 3100.65,1300.09 3402.41,1305.79 3446.71,1305.43 3496.01,1306.86 3325.34,1309.67 2593.24,1324.2 2632.93,1324.2 2687.83,1324.2 2723.92,1323.89 3042.14,1326.61 4013.39,1335.16 4127.46,1336.3 2045.22,1337.15 2083.22,1340 3940.61,1341.16 3100.4,1347.46 1925.67,1354.5 2271,1354.5 3697.32,1354.5 2986.19,1366.38 1994.56,1384.24 3100.14,1384.13 3012.59,1398.66 1951.27,1400.29 3303.89,1405.45 3100.4,1419.28 2594.52,1425.3 2146.47,1425.61 2267.2,1425.77 2550.57,1426.15 3523.9,1435.16 3454.07,1436.27 3490.82,1436.63 2221.07,1438.03 2876.73,1438.83 4022.87,1440.39 3299.65,1442.79 2693.16,1444.38 2730.78,1444.38 2763.9,1444.38 2800.2,1444.38 2837.5,1444.38 3577.42,1445.33 3411.62,1450.7 4136.48,1469.7 2768.92,1476.13 3472.52,1481.64 2985.73,1486.23 3415.72,1485.75 3537,1488.64 2705.58,1493.28 2739.87,1498.99 3351.62,1507.12 3508.7,1521.56 2670.12,1523.46 3449.22,1526.18 3394.93,1527.33 3138.81,1528.27 3318.7,1530.22 2270.41,1531.75 2202.33,1533.68 2702.85,1535.2 2147.09,1536.25 3974.61,1535.91 2765.11,1538.04 2729.16,1560.86 4131.07,1568.86 1925.67,1590.72 2043.78,1590.72 2161.89,1590.72 2280,1590.72 2696.31,1596.32 2744.89,1607.41 2715.77,1633.36 4009.03,1635.48 2785.42,1637.05 2752.14,1651.71 4123.86,1664.4 2715.79,1670.05 3091.34,1677.23 3159.23,1677.23 3123.9,1679.01 2938.79,1699.68 2967.33,1699.43 1866.61,1708.83 1984.72,1708.83 2102.83,1708.83 2220.94,1708.83 3992.6,1708.83 3155.96,1712.04 3095.73,1713.33 3091.34,1745.11 3128.43,1744.74 3159.23,1745.11 4122.05,1774.37 1925.67,1826.94 2043.78,1826.94 2161.89,1826.94 2280,1826.94 3483.77,1851.65 3538.28,1852.95 3450.7,1864.4 4053.82,1873.83 4083.37,1873.83 4112.93,1873.83 4142.49,1873.83 3128.76,1876.1 3196.62,1881.92 3128.76,1904.97 3196.62,1909.34 3468.07,1909.74 3439.1,1933.04 3128.76,1933.84 3196.62,1936.75 3503.89,1943.78 1984.72,1945.05 2102.83,1945.05 2220.94,1945.05 3638.27,1945.05 3992.6,1945.05 3128.76,1962.71 3196.62,1964.17 3086.67,1965.99 3466.81,1965.79 3009.81,1969.54 3039.41,1970.53 3434.06,1979.65 3520.97,1986.58 3128.76,1991.59 3196.62,1991.59 2100.69,2000.9 2804.06,2000.42 2666.85,2003.79 3626.77,2003.58 2982.5,2005.15 3691.45,2008.72 2724.11,2011.07 3037.96,2011.18 3069.6,2013.79 3447.91,2016.17 2628.65,2017.6 3286.69,2017.43 2271.98,2019.03 3128.76,2019 3196.62,2019 3324.48,2019.32 3580.8,2019.32 3546.06,2024.24 3500.82,2032.55 2119.96,2033.55 3240.09,2035.07 2597.65,2035.56 2690.51,2035.67 3392.49,2036.33 2788.88,2036.72 2165.88,2037.95 2209.57,2037.76 2838.15,2037.42 3095.26,2039.17 2642.96,2041.22 2950.23,2040.54 3020.32,2040.54 3430.4,2040.48 3676.7,2040.99 2985.62,2042.97 2909.24,2043.65 3297.21,2043.99 2730.04,2044.41 2873.6,2044.44 2560.62,2045.53 3057.1,2045.4 2256.94,2046.42 3128.76,2046.42 3196.62,2046.42 2123.77,2073.83 2153.33,2073.83 2182.89,2073.83 2212.45,2073.83 2242.01,2073.83 2271.56,2073.83 2301.12,2073.83 2330.68,2073.83 2360.24,2073.83 2389.8,2073.83 2419.36,2073.83 2448.91,2073.83 2478.47,2073.83 2508.03,2073.83 2537.59,2073.83 2567.15,2073.83 2596.71,2073.83 2626.27,2073.83 2655.82,2073.83 2685.38,2073.83 2714.94,2073.83 2744.5,2073.83 2774.06,2073.83 2803.62,2073.83 2833.17,2073.83 2862.73,2073.83 2892.29,2073.83 2921.85,2073.83 2951.41,2073.83 2980.97,2073.83 3010.52,2073.83 3040.08,2073.83 3069.64,2073.83 3099.2,2073.83 3128.76,2073.83 3196.62,2073.83 3226.18,2073.83 3255.74,2073.83 3285.3,2073.83 3314.86,2073.83 3344.41,2073.83 3373.97,2073.83 3403.53,2073.83 3433.09,2073.83 3462.65,2073.83 3492.21,2073.83 3521.76,2073.83 3551.32,2073.83 3580.88,2073.83 3610.44,2073.83 3640,2073.83 3669.56,2073.83 3699.12,2073.83 3728.67,2073.83 3758.23,2073.83 3787.79,2073.83 3817.35,2073.83 3846.91,2073.83 3876.47,2073.83 3906.02,2073.83 3935.58,2073.83 3965.14,2073.83 3994.7,2073.83 4024.26,2073.83
  other v2: 3386.69,1999.35
  other v3: 3402.43,224.46 3449.7,230.39 3392.62,414.32 3460.37,414.32 3464.76,535.03 3387.62,538.3 3464.76,582.67 3387.62,585.94 3464.76,630.3 3379,632.79 3345.31,666.47 3446.55,674.33 3311.79,700.32 3412.87,708.01 3396.77,744.1 3311.79,747.42 3396.77,791.73 3311.79,795.06 3396.77,887.01 3396.77,934.65 3541.93,1517.4
  other v4: 1860.69,1214.28
  other v6: 3114.67,1537.64 3110.73,1561.71
LED0: P2.20 R2.1 | length 414.3
  Top Layer w10: v2(2712.56,907.72) 2713.14,908.3 2758.54,908.3 R2.1
  Bottom Layer w10: P2.20 2507.85,1027.67 2507.85,973.03 2573.16,907.72 v2(2712.56,907.72)
LED1: P2.22 R3.1 | length 381
  Top Layer w10: v2(2710.24,843.18) 2713.61,839.81 2731.24,839.81 2759.11,811.94 R3.1
  Bottom Layer w10: P2.22 2551.95,883.58 2669.85,883.58 v2(2710.24,843.18)
NetC2_1: C2.1 C9.1 C10.1 L2.2 | length 565
  Top Layer w7: C9.1 1908.26,1151.91 C2.1 1960.87,1189.28 1971.08,1189.28 1991.27,1169.09 1992.25,1169.09 2007.06,1154.28 L2.2
  Top Layer w10: C9.1@1898.15,1153.49 C9.1
  Top Layer w20: v4(1854.63,1155.07) 1856.21,1153.49 C9.1@1898.15,1153.49
  Top Layer w25: C10.1@1486.79,1163.57 v4(1541.55,1163.57)
  Bottom Layer w25: v4(1541.55,1163.57) 1844.78,1163.57 v4@1853.28,1155.07 ; v4(1854.63,1155.07) v4@1853.28,1155.07 ; v4@1855.12,1153.22 v4@1853.28,1155.07
NetC2_2: C2.2 C4.1 C13.2 L3.2 | length 560
  Top Layer w7: C13.2 1908.04,1267.04 1912.71,1267.04 1941.07,1238.67 1943.95,1238.67 1953.25,1229.38 C2.2@1953.25,1226.5 ; C2.2 1968.74,1230.36 1991.27,1252.89 1992.25,1252.89 2007.06,1267.7 L3.2
  Top Layer w20: v4(1856.63,1275.06) 1856.77,1275.21 1899.59,1275.21 C13.2
  Top Layer w25: C4.1@1489.04,1266.57 v4(1541.55,1266.57)
  Bottom Layer w25: v4(1541.55,1266.57) 1846.77,1266.57 1855.27,1275.06 v4(1856.63,1275.06)
NetC4_2: C4.2 C6.2 C14.2 R13.1 R16.1 | length 621.6
  Top Layer w25: v4(1833.63,1458.44) R16.1@1869.59,1458.44
  Top Layer w35: C4.2@1447.71,1271.18 1447.71,1379.03 R13.1@1447.71,1427.73
  Bottom Layer w25: v4(1450.42,1406.05) 1502.82,1458.44 ; 1502.27,1458.44 1502.82,1458.44 ; 1857.25,1458.44 1502.82,1458.44
NetC10_2: C10.2 C12.1 C17.1 R14.1 | length 157
  Top Layer w35: R14.1@1447.71,1001.81 C10.2@1447.71,1158.86
NetC15_2: C15.2 R12.1 R16.2 | length 98.3
  Top Layer w10: R16.2@1905.2,1457.56 1905.89,1458.25 R12.1@1953.87,1458.25 ; R12.1 1953.82,1459.37 1999.99,1459.37 C15.2
NetD1_1: D1.1 R1.1 | length 97.4
  Top Layer w10: R1.1 3491.14,841.81 3504.03,854.71 D1.1
NetD2_2: D2.2 R2.2 | length 86.4
  Top Layer w10: R2.2 D2.2
NetD3_2: D3.2 R3.2 | length 86.4
  Top Layer w10: R3.2 D3.2
NetF1_1: F1.1 S1.2 | length 218.7
  Top Layer w30: F1.1@2245.16,408.02 2245.72,407.47 2245.72,190.34 S1.2
NetP1_A5: P1.A5 R4.2 | length 152.9
  Top Layer w7: R4.2@3324.05,435.66 3332.37,427.35 3332.37,426.37 3376.98,381.76 P1.A5
NetP1_B5: P1.B5 R7.1 | length 143.7
  Top Layer w7: P1.B5 3495.09,403.81 3517.65,426.37 3517.65,427.35 R7.1@3525.96,435.66
NetP4_A5: P4.A5 R8.2 | length 138.7
  Top Layer w8: R8.2 2747.89,402.2 2763.65,386.44 P4.A5
NetP4_B5: P4.B5 R11.1 | length 166.5
  Top Layer w8: P4.B5 2881.76,403.08 2915.61,436.93 R11.1
NetR13_2: R13.2 R14.2 R17.1 | length 20956.2
  Top Layer w35: v5(96.55,1137.57) 96.55,612.57 231.55,477.57 1556.55,477.57 1691.55,612.57 1691.55,1817.57 1556.55,1952.57 231.55,1952.57 96.55,1817.57 96.55,1212.57 146.55,1162.57 146.55,642.57 261.55,527.57 1526.55,527.57 1641.55,642.57 1641.55,1215.07 1641.55,1787.57 1526.55,1902.57 261.55,1902.57 146.55,1787.57 146.55,1237.57 196.55,1187.57 196.55,672.57 291.55,577.57 1496.55,577.57 1591.55,672.57 1591.55,1757.57 1496.55,1852.57 291.55,1852.57 196.55,1757.57 196.55,1262.57 246.55,1212.57 246.55,702.57 321.55,627.57 1466.55,627.57 1541.55,702.57 1541.55,817.57 1492.18,866.94 R14.2@1492.18,995.39 ; v5(246.55,1287.57) 246.55,1727.57 321.55,1802.57 1466.55,1802.57 1541.55,1727.57 1541.55,1589.75 1492.18,1540.38 R13.2@1492.18,1435.26
  Bottom Layer w30: v4(1642.7,1215.07) R17.1@1697.7,1215.07
  Bottom Layer w35: v5(96.55,1137.57) v5(246.55,1287.57)
NFC+: L3.1 P2.21 U2.9 | length 1705.8
  Top Layer w7: L3.1 2067.69,1267.7 2082.5,1252.89 2083.48,1252.89 2350.68,985.69 P2.21 2393.95,941.58 2487.5,941.58 2515.17,969.24 2654.65,1108.72 2976.68,1108.72 3129.17,1261.21 3129.17,1470.2 3073.51,1525.86 3073.51,1591.19 U2.9
NFC-: L2.1 P2.23 U2.10 | length 1715.2
  Top Layer w7: L2.1 2094.26,1153.3 2350.68,896.88 P2.23 2390.18,924.35 2487.25,924.35 2591.17,1028.28 2655.18,1092.28 2977.21,1092.28 3141.17,1256.23 3141.17,1475.17 3085.53,1530.81 3085.53,1583.72 U2.10
NFC_CTR: P2.18 R12.2 | length 731.1
  Top Layer w7: R12.2 1959.24,1500.49 2239.88,1500.49 2302.27,1438.1 2302.27,1267.87 2328.85,1241.29 2394.24,1241.29 P2.18
NFCI: C15.1 P2.17 R15.1 U2.7 | length 1555.7
  Top Layer w7: C15.1 2082.14,1458.25 2153.81,1458.25 2241.25,1370.81 2241.25,1282.11 2338.51,1184.85 P2.17 2394.75,1140.78 2490.09,1140.78 2574.34,1225.03 2900.32,1225.03 3049.51,1374.21 3049.51,1606.16 U2.7
NFCM: C16.1 P2.19 R15.2 U2.8 | length 1633
  Top Layer w7: R15.2 2083.12,1421.33 2169.54,1334.91 2169.54,1265.99 P2.19 2396.68,1038.85 2479.44,1038.85 2608.33,1167.74 2954.34,1167.74 3070.9,1284.3 3070.9,1455.25 3070.9,1495.29 3061.51,1504.69 3061.51,1598.68 U2.8
PA0: P2.4 U2.39 | length 689.8
  Top Layer w7: P2.4 2484.48,1918.66 2966.52,1918.66 U2.39
PA1: P2.5 U2.40 | length 812.7
  Top Layer w7: P2.5 2397.64,1831.81 2483.25,1831.81 2554.61,1903.18 2962.51,1903.18 U2.40
PA2: P2.6 U2.41 | length 695.4
  Top Layer w7: P2.6 2455.84,1790.01 2485.58,1790.01 2584.66,1889.09 2957.11,1889.09 U2.41
PA3: P2.7 U2.42 | length 821
  Top Layer w7: P2.7 2401.86,1736.03 2469.85,1736.03 2610.71,1876.88 2949.83,1876.88 U2.42
PA4: P2.1 U2.36 | length 857.2
  Top Layer w7: P2.1 2394.84,2029.01 2478.5,2029.01 2543.75,1963.77 2979.87,1963.77 3033.34,1910.3 3033.34,1909.95 3079.27,1864.02 3079.62,1864.02 U2.36
PA5: P2.2 U2.37 | length 714.7
  Top Layer w7: P2.2 2485.71,1949.82 2974.33,1949.82 U2.37
PA6: P2.3 U2.38 | length 808.9
  Top Layer w7: P2.3 2400.65,1934.83 2969.84,1934.83 U2.38
PA7: P2.16 U2.4 | length 830.5
  Top Layer w7: P2.16 2514.9,1349.07 2882.45,1349.07 3011.84,1478.47 3011.84,1626.94 U2.4
PA8: P2.15 U2.5 | length 970.9
  Top Layer w7: v2(2780.32,1321.79) 2877.3,1321.79 3023.84,1468.33 3023.84,1619.47 U2.5
  Bottom Layer w7: P2.15 2400.41,1334.58 2490.76,1334.58 2530.84,1294.5 2753.03,1294.5 v2(2780.32,1321.79)
PA9: P2.14 U2.6 | length 897.4
  Top Layer w7: v2(2812.53,1296.57) 2815.71,1299.76 2873.14,1299.76 3037.51,1464.12 3037.51,1613.65 U2.6
  Bottom Layer w7: P2.14 2452.52,1383.01 2526.19,1383.01 2548.06,1361.13 2787.57,1361.13 2812.53,1336.17 v2(2812.53,1296.57)
PA10: P2.13 U2.48 Y2.1 | length 819.5
  Top Layer w7: P2.13@2355.66,1393.59 2359.42,1393.59 2402.94,1437.11 2483.2,1437.11 2630.65,1584.56 2630.65,1654.6 2684.45,1708.39 2826.71,1708.39 Y2.1 ; Y2.1@2845.3,1691.12 2847.72,1693.55 2894.67,1693.55 2928.73,1727.61 2981.68,1727.61 2981.9,1727.83 2981.96,1727.83 U2.48
PA11: P2.12 U2.47 Y2.2 | length 746.9
  Top Layer w7: P2.12 2493.79,1484.85 2606.02,1597.08 2606.02,1690.43 2692.88,1777.29 2897.01,1777.29 Y2.2 ; Y2.2@2900.69,1753.9 2904.07,1757.28 2971.99,1757.28 U2.47
PA12: P2.11 U2.46 | length 893.4
  Top Layer w7: P2.11@2353.14,1484.85 2397.74,1529.45 2491.85,1529.45 2575.57,1613.17 2575.57,1712.98 2686.87,1824.28 2924.49,1824.28 U2.46
PA13: P2.9 U2.45 | length 906.7
  Top Layer w7: P2.9 2394.07,1541.45 2471.7,1541.45 2545.79,1615.54 2545.79,1658.15 2545.79,1712.54 2672.33,1839.08 2929.17,1839.08 U2.45
PA14: P2.10 U2.44 | length 771.3
  Top Layer w7: P2.10 2509.06,1643.24 2509.06,1714.5 2645.64,1851.08 2936.66,1851.08 U2.44
PA15: P2.8 U2.43 | length 703.8
  Top Layer w7: P2.8 2628.9,1863.08 2944.15,1863.08 U2.43
PB0: P3.7 U2.24 | length 535.9
  Top Layer w7: U2.24 3278.27,1684.85 P3.7
PB1: P3.8 U2.23 | length 681.1
  Top Layer w7: U2.23 3275.88,1667.76 3728.59,1667.76 3759.18,1637.17 3838.69,1637.17 P3.8
PB2: P3.9 U2.22 | length 588.8
  Top Layer w7: U2.22 3268.39,1655.76 3715.47,1655.76 P3.9
PB3: P3.10 U2.21 | length 730.5
  Top Layer w7: U2.21 3260.91,1643.76 3655.19,1643.76 3757.61,1541.34 3842.87,1541.34 P3.10
PB4: P3.11 U2.20 | length 641.6
  Top Layer w7: U2.20 3266.87,1618.3 3652.93,1618.3 P3.11
PB5: P3.12 U2.19 | length 792.8
  Top Layer w8: U2.19 3266.95,1598.74 3598.05,1598.74 3766.84,1429.95 3831.47,1429.95 P3.12
PB6: P3.13 U2.18 | length 694.4
  Top Layer w7: U2.18 3273.81,1572.39 3598.84,1572.39 P3.13
PB7: P3.14 U2.17 | length 839.1
  Top Layer w7: U2.17 3267.59,1559.12 3547.03,1559.12 3768.33,1337.82 3839.34,1337.82 P3.14
PB10: P1.A7 P1.B7 P3.15 U2.16 | length 2012.4
  Top Layer w7: U2.16 3190.69,1616.53 3190.69,1615.98 3369.36,1437.31 3369.36,1411.04 3379.86,1400.54 v2(3379.86,1396.44) 3369.36,1385.94 3369.36,705.04 3432.69,641.72 3432.69,343.59 3433.63,342.65 3433.63,307.13 P1.A7 3436.03,266.01 3428.19,258.17 3404.51,258.17 3396.66,266.01 P1.B7
  Bottom Layer w7: v2(3379.86,1396.44) 3394.97,1381.33 3615.15,1381.33 3704.27,1292.2 3779.03,1292.2 P3.15
PB11: P1.A6 P1.B6 P3.16 U2.15 | length 2189
  Top Layer w7: U2.15 3180.95,1606.79 3181.5,1606.79 3356.36,1431.92 3356.36,1411.04 3345.86,1400.54 v2@3345.86,1398.49 ; v2(3345.86,1396.44) v2@3345.86,1398.49 ; P1.A6 3418.75,307.13 3418.75,342.65 3419.69,343.59 3419.69,636.33 3356.36,699.66 3356.36,1387.99 v2@3345.86,1398.49 ; P1.B6 3455.72,354.47 3463.75,362.51 v2(3463.75,368.19)
  Bottom Layer w7: v2@3345.86,1397.46 v2(3345.86,1396.44) 3345.86,1376.84 3354.37,1368.33 3580.76,1368.33 3710.41,1238.68 3841.47,1238.68 3886.38,1283.59 P3.16
  Bottom Layer w8: v2(3407.36,368.19) v2(3463.75,368.19)
PB12: P3.17 P4.A7 P4.B7 U2.14 | length 2353.6
  Top Layer w7: P4.B7 2783.34,262.7 2787.73,258.31 2818.22,258.31 2822.71,262.8 P4.A7 2820.3,307.13 2820.3,342.65 2819.37,343.59 2819.37,453.17 3286.72,920.52 3286.72,1352 3245.33,1393.38 3245.33,1431.64 3255.83,1442.14 v2(3255.83,1446.24) 3255.83,1451.31 3246.3,1460.84 3246.3,1521.4 3171.21,1596.49 3171.21,1597.04 U2.14
  Bottom Layer w7: v2(3255.83,1446.24) 3255.83,1395.37 3300.58,1350.62 3561.74,1350.62 3727.51,1184.85 P3.17
PB13: P3.18 P4.A6 P4.B6 U2.13 | length 2521
  Top Layer w7: P4.A6 2805.43,307.13 2805.43,342.65 2806.37,343.59 2806.37,358.84 2795.67,369.54 v2(2795.67,374.86) 2795.67,380.19 2806.37,390.89 2806.37,458.55 3273.72,925.91 3273.72,1346.61 3232.33,1388 3232.33,1431.64 3221.83,1442.14 v2(3221.83,1446.24) 3227.02,1451.43 3227.02,1454.78 3233.3,1461.06 3233.3,1516.02 3162.02,1587.3 3161.46,1587.3 U2.13 ; P4.B6 2842.39,359.51 2852.06,369.18 v2(2852.06,374.86)
  Top Layer w8: v2@2795.67,369.45 v2@2795.67,369.54 ; v2@2795.67,380.19 v2@2795.67,380.28
  Bottom Layer w7: v2@2795.83,374.7 v2@2851.9,374.7 ; v2(3221.83,1446.24) 3221.83,1410.99 3295.2,1337.62 3545.1,1337.62 3741.65,1141.07 3848.58,1141.07 3886.38,1178.87 P3.18
  Bottom Layer w8: v2(2795.67,374.86) v2@2795.83,374.7 ; v2@2851.9,374.7 v2@2852.06,374.54
PB14: P3.19 U2.12 | length 949.6
  Top Layer w7: U2.12 3193.54,1535.73 3193.54,1370.81 v2(3242.33,1322.02)
  Bottom Layer w7: v2(3242.33,1322.02) 3288.36,1275.99 3540.83,1275.99 3731.96,1084.85 P3.19
PB15: P3.20 U2.11 | length 1102.3
  Top Layer w7: U2.11 3180.56,1529.22 3180.56,1348.49 v2(3200.4,1328.66)
  Bottom Layer w7: v2(3200.4,1328.66) 3271.22,1257.84 3514.16,1257.84 3732.75,1039.25 3840.78,1039.25 P3.20
PB18: P3.1 U2.30 | length 725.6
  Top Layer w7: U2.30 3213.59,1809.22 3647.22,1809.22 3705.63,1867.63 3705.63,1948.72 3741.76,1984.85 P3.1
PB19: P3.2 U2.29 | length 802.6
  Top Layer w7: U2.29 3221.08,1797.22 3660.56,1797.22 3717.83,1854.5 3717.83,1905.98 3746.43,1934.58 3836.1,1934.58 P3.2
PB20: P3.3 U2.28 | length 625.3
  Top Layer w7: U2.28 3228.57,1785.22 3665.53,1785.22 3725.68,1845.38 3746.9,1845.38 P3.3
PB21: P3.4 U2.27 | length 720.9
  Top Layer w7: U2.27 3236.05,1773.22 3670.5,1773.22 3730.65,1833.38 3837.13,1833.38 3886.38,1882.62 P3.4
PB23: P3.6 S2.2 U2.25 | length 2130.9
  Top Layer w7: U2.25@3239.29,1737.44 3249.31,1747.46 3610.77,1747.46 3612.53,1749.22 3733.65,1749.22 3750.72,1732.15 3833.68,1732.15 P3.6 4010.84,1784.85 4048.26,1747.42 S2.2
V5V: C3.1 F1.2 U1.3 | length 213.6
  Top Layer w30: C3.1@2165.66,464.43 2243.75,464.43 2245.16,463.02 F1.2 2305.16,463.02 2315.16,473.02 U1.3
VCC: C11.2 P2.26 P3.21 U2.3 | length 2415.3
  Top Layer w7: C11.2 2955.66,1556.94 2955.66,1590.27 U2.3
  Top Layer w20: v2(2923.16,1467.62) v2(2948,1492.46) 2952.84,1497.3 C11.2
  Top Layer w30: P2.26 2512.52,784.85 2530.09,802.42 2530.09,864.57 2665.57,1000.05 v2(2943.05,1000.05) 2974.12,1000.05 v2(2974.25,999.93)
  Bottom Layer w30: v2@2923.05,1463.67 2944.37,1442.35 ; v2(2923.16,1467.62) v2@2944.37,1488.83 ; v2(2948,1492.46) v2@2944.37,1488.83 ; P3.21 2994.61,984.85 ; 2944.37,1019.1 2978.62,984.85 ; 2944.37,1019.1 2944.37,1035.1 ; 2944.37,1019.1 2944.37,1001.37 v2(2943.05,1000.05) 2958.26,984.85 2978.62,984.85 ; 2944.37,1035.1 2944.37,1442.35 ; 2944.37,1035.1 2994.61,984.85 ; 2944.37,1442.35 v2@2944.37,1488.83 ; 2978.62,984.85 2994.61,984.85
VDCIA: C1.2 C8.1 L1.2 U2.1 U2.35 | length 779
  Top Layer w7: C1.2 2960.05,1633.63 U2.1 ; C8.1 3082.26,1894.43 3084.51,1892.18 3100.41,1876.28 3100.41,1862.71 U2.35
  Top Layer w20: L1.2 2821.04,1560.38 2860.53,1599.87 2911.7,1599.87 2924.1,1612.27 C1.2@2924.1,1633.63 ; C1.2 2925.18,1659.45 v2(2926.53,1660.79) ; C8.1 3094.62,1908.15 3094.62,1929.95 v2(3094.14,1930.42)
  Bottom Layer w20: v2(2926.53,1660.79) 2927.15,1661.41 2980.02,1661.41 3023.56,1704.95 3023.56,1859.84 v2(3094.14,1930.42)
VINTA: C7.1 U2.33 | length 98
  Top Layer w7: U2.33 3204.16,1858.25 3218.72,1858.25 3234.16,1873.7 C7.1
VSW: L1.1 U2.2 | length 243.3
  Top Layer w7: L1.1 2892.3,1560.38 2908.48,1576.56 2922.47,1576.56 ; L1.1@2900.67,1554.76 2916.98,1571.07 ; L1.1@2901.58,1573.58 2903.54,1571.62 2904.09,1571.07 2916.98,1571.07 ; U2.2 2922.47,1576.56 ; 2916.98,1571.07 2922.47,1576.56
X32MI: U2.32 Y1.1 | length 237.6
  Top Layer w7: U2.32 3210.34,1844.94 3253.31,1844.94 3268.15,1859.79 3268.15,1927.42 3301.03,1960.3 Y1.1
X32MO: U2.31 Y1.3 | length 229.6
  Top Layer w7: U2.31 3217.83,1832.94 3339.02,1832.94 3375.83,1869.75 Y1.3
pads on no net: P1.A8 P1.B8 P4.A8 P4.B8 S1.0 S1.3

## Polygon pours and split planes (outlines as drawn)
GND on Bottom Layer "GND" (hatched Horizontal grid 8 track 8, remove dead copper, pour order 1): 1711.42,2141.76 4173.23,2141.76 4173.23,-4 1711.42,-4
GND on Top Layer "GND" (hatched Horizontal grid 8 track 8, remove dead copper, pour order 0): 1711.42,2141.76 4173.23,2141.76 4173.23,0 1711.42,0

## Keep-outs
Keep-Out Layer:
  lines w10: 78.49,2325.79 4094.49,2325.79 cw(c4094.49,2247.05) 4173.23,2247.05 4173.23,78.74 cw(c4094.49,78.74) 4094.49,0 78.74,0 cw(c78.74,78.74) 0,78.74 0,2247.27 cw(c78.74,2247.27) 78.74,2326.01

## Other copper
Top Layer:
  rectangle net GND: 3186.9,2042.4 3999.21,2085.61
  pour cut-out: 2801.13,1582.13 2801.13,1496.38 2914.14,1496.33 2914.14,1582.32
Multi-Layer:
  pour cut-out: 1841.92,0 1841.92,2325.79 0,2325.78 0,0
  pour cut-out: 4173.22,2081.61 1685.03,2081.61 1685.03,2325.79 4173.23,2325.79

## Silkscreen, mask and mechanical layers (free items; w line width, h text height)
Top Overlay:
  drawing of 123 lines, arcs and shapes, not listed
  text "PA4" at 2163.64,1961.07 h35
  text "PA5" at 2518.55,1961.07 h35
  text "PB18" at 3573.86,1960.06 h35
  text "PB19" at 3952.6,1960.06 h35
  text "PA0" at 2518.55,1861.57 h35
  text "PA6" at 2163.64,1861.12 h35
  text "PB20" at 3568.03,1860.15 h35
  text "PB21" at 3952.6,1860.15 h35
  text "PA2" at 2518.55,1762.07 h35
  text "PA1" at 2175.3,1761.17 h35
  text "PB22" at 3568.03,1760.23 h35
  text "PB23" at 3952.6,1760.23 h35
  text "PA15" at 2518.55,1662.57 h35
  text "PA3" at 2163.64,1661.22 h35
  text "PB0" at 3603.02,1660.32 h35
  text "PB1" at 3952.6,1660.32 h35
  text "PA14" at 2518.55,1563.07 h35
  text "PA13" at 2134.48,1561.27 h35
  text "PB2" at 3603.02,1560.41 h35
  text "PB3" at 3952.6,1560.41 h35
  text "PA11" at 2518.55,1463.57 h35
  text "PA12" at 2134.48,1461.32 h35
  text "PB4" at 3603.02,1460.5 h35
  text "PB5" at 3952.6,1460.5 h35
  text "PA9" at 2518.55,1364.07 h35
  text "PA10" at 2134.48,1361.38 h35
  text "PB6" at 3603.02,1360.58 h35
  text "PB7" at 3952.6,1360.58 h35
  text "PA7" at 2518.55,1264.57 h35
  text "PA8" at 2163.64,1261.43 h35
  text "PB10" at 3573.86,1260.67 h35
  text "PB11" at 3952.6,1260.67 h35
  text "PB9" at 2163.64,1161.48 h35
  text "PB12" at 3573.86,1160.76 h35
  text "PB13" at 3952.6,1160.76 h35
  text "NFC_CTR" at 2518.55,1159.23 h35
  text "沁恒微电子" at 3111.36,1087.19 h60
  text "PB8" at 2163.64,1061.53 h35
  text "PB14" at 3573.86,1060.85 h35
  text "PB15" at 3952.6,1060.85 h35
  text "LED0" at 2518.55,1059.73 h35
  text "http://wch.cn" at 3124.66,1038.11 h50
  text "PB17" at 2134.48,961.58 h35
  text "VCC" at 3603.02,960.93 h35
  text "GND" at 3952.6,960.93 h35
  text "LED1" at 2518.55,960.23 h35
  text "PB16" at 2134.48,861.63 h35
  text "GND" at 2518.55,860.73 h35
  text "3V3" at 3603.02,861.02 h35
  text "GND" at 3952.6,861.02 h35
  text "GND" at 2163.64,761.68 h35
  text "VCC" at 2518.55,761.23 h35
  text "5V" at 3638.01,761.11 h35
  text "GND" at 3952.6,761.11 h35
  text "GND" at 2163.64,661.73 h35
  text "3V3" at 2518.55,661.73 h35
  text "5V" at 3638.01,661.2 h35
  text "GND" at 3952.6,661.2 h35
  text "HS" at 2793.12,419.69 h80
  text "FS" at 3369.03,419.69 h80
  text "ON" at 2203.03,27.96 h35
  text "OFF" at 2337.67,27.96 h35
  text "CH585M-R1-1v1" at 159.62,26.85 h40
Mechanical 1:
  lines w10: 78.49,2325.79 4094.49,2325.79 cw(c4094.49,2247.05) 4173.23,2247.05 4173.23,78.74 cw(c4094.49,78.74) 4094.49,0 78.74,0 cw(c78.74,78.74) 0,78.74 0,2247.05 cw(c78.74,2247.05) 78.74,2325.79

## Text inside footprints (layer, text, board x,y; h text height)
D1: Top Overlay "+" at 3534.26,912.53 h40 r270
D2: Top Overlay "+" at 2977.7,919.86 h40 r270
D3: Top Overlay "+" at 2977.7,821.94 h40 r270